# Altium PCB PCB1.PcbDoc
Units mm, origin at the board's own origin, x right, y up, seen from the top; angles counter-clockwise.
Board outline 128.27 x 38.1 mm, 4 copper layers (Top Layer, Inner Layer 1, Inner Layer 2, Bottom Layer), stack 1.586 mm thick; 152 components, 90 nets, 360 pads, 156 vias.
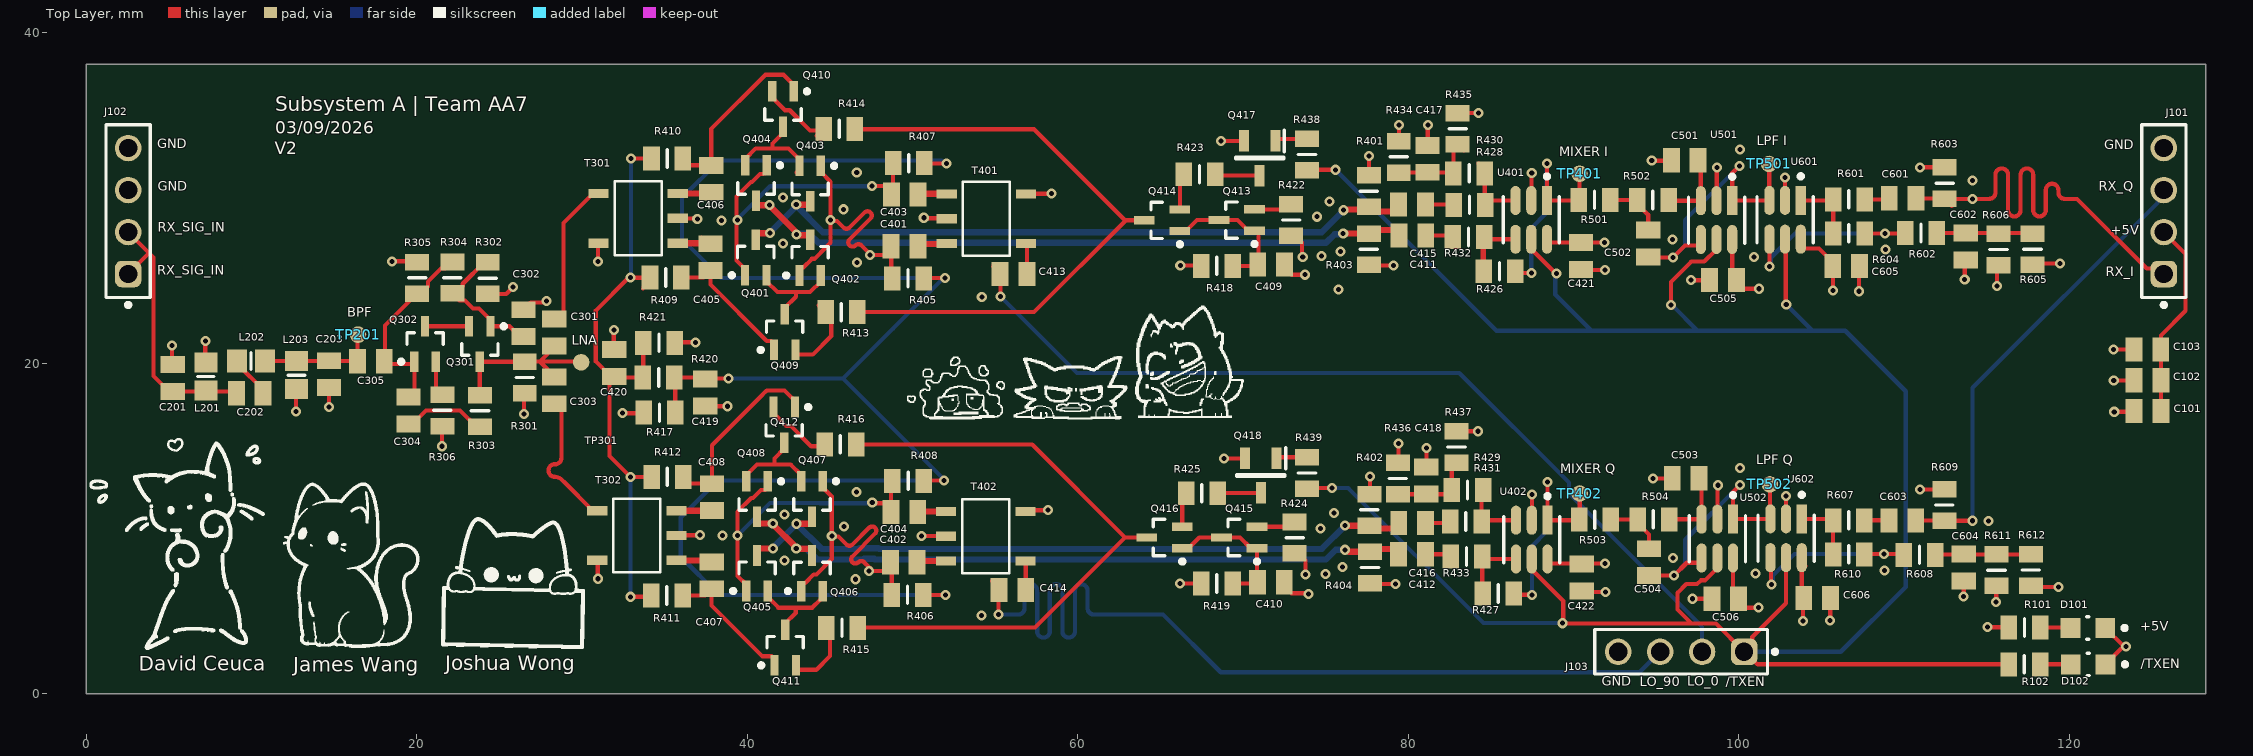
[diagram p0: Top Layer view]
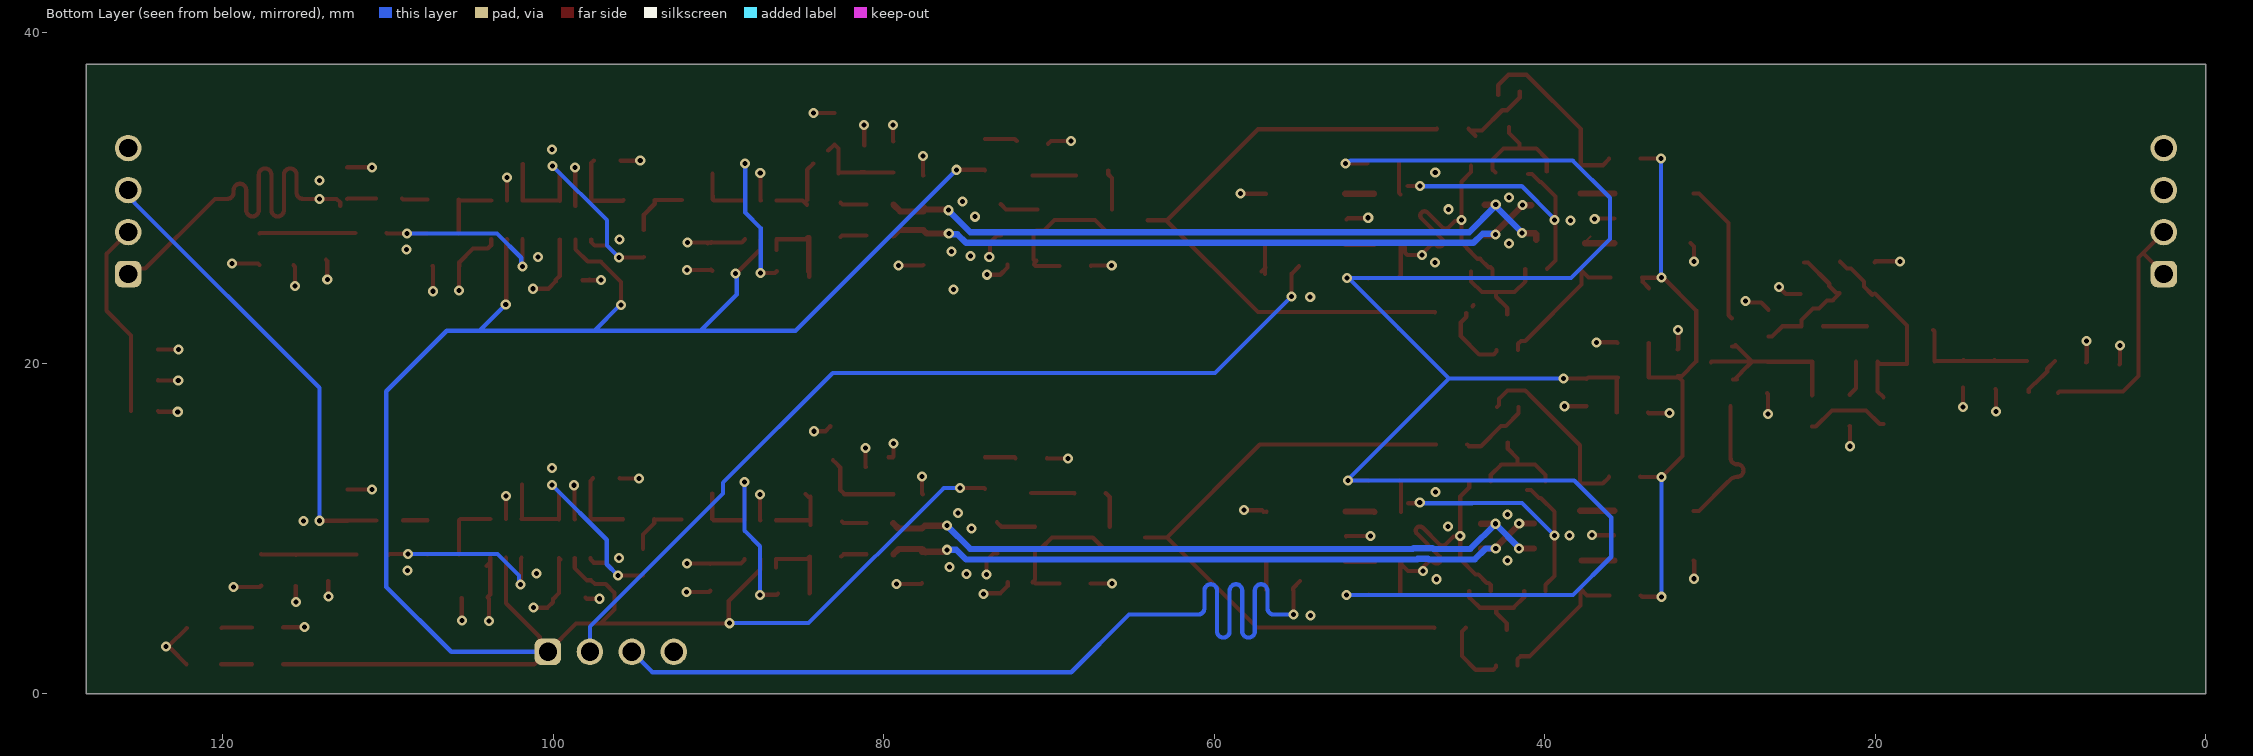
[diagram p1: Bottom Layer view, seen from below]
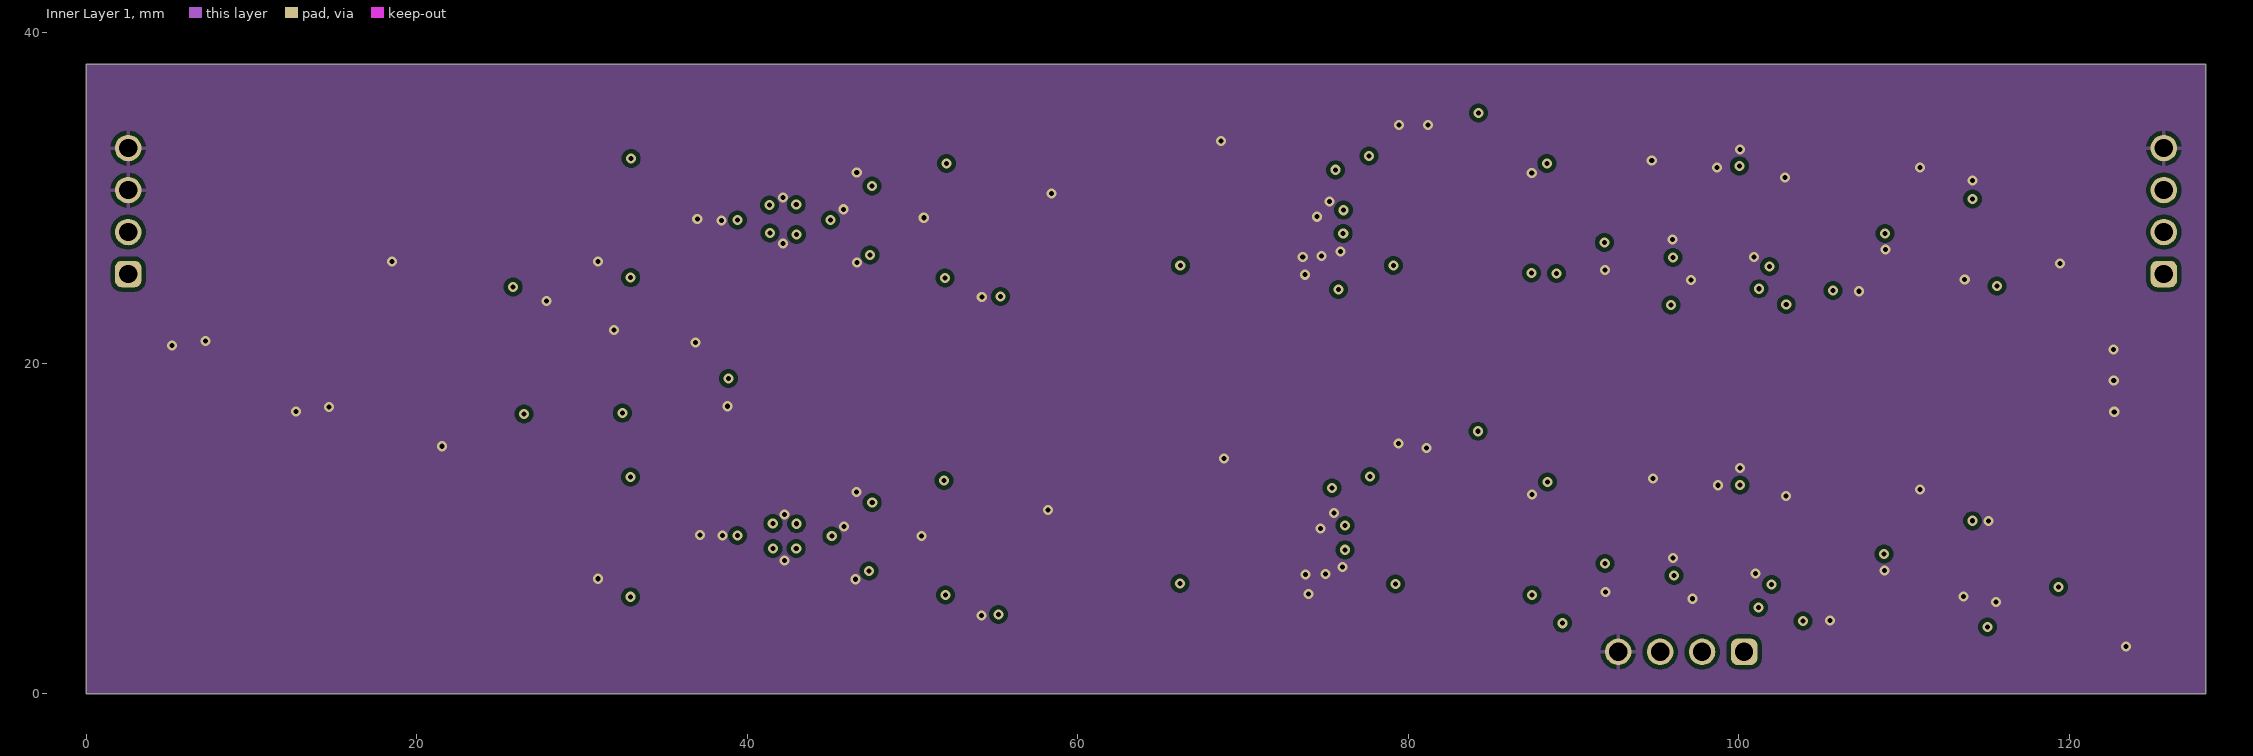
[diagram p2: Inner Layer 1]
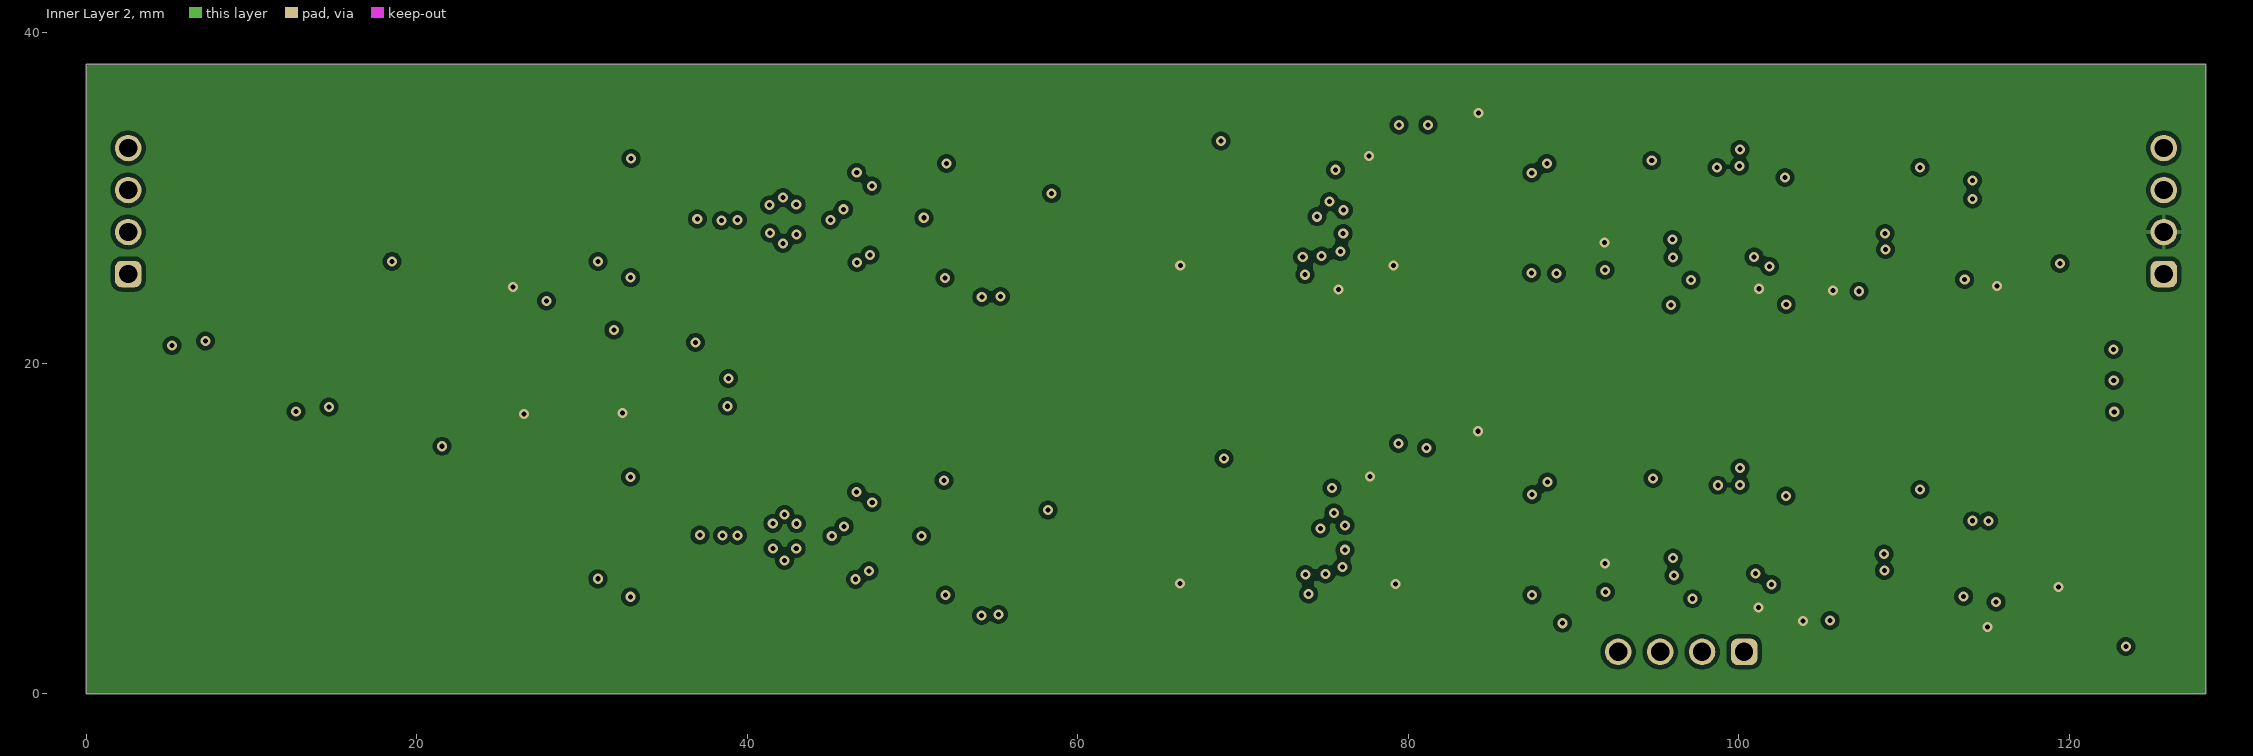
[diagram p3: Inner Layer 2]
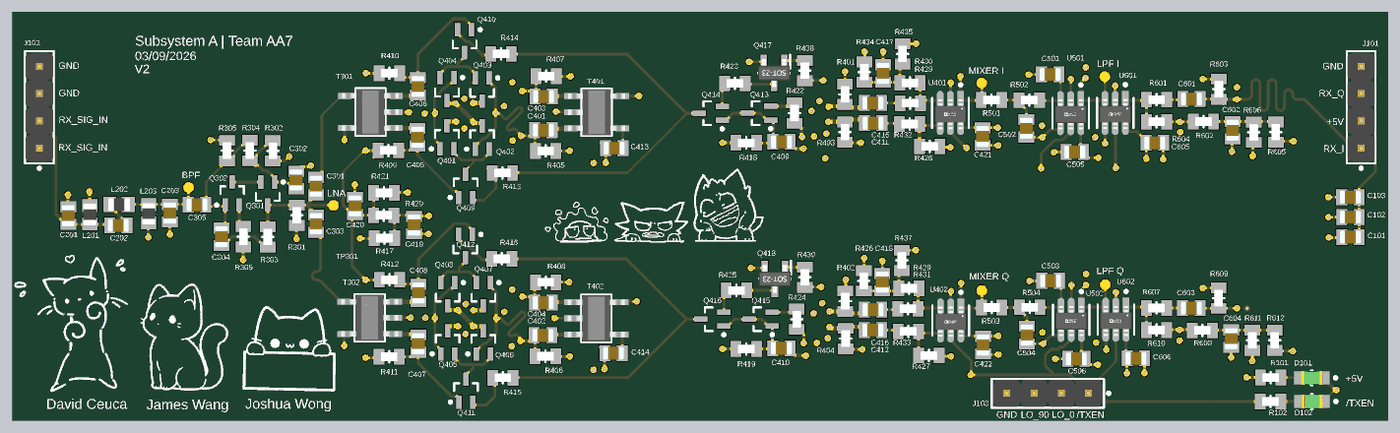
[diagram p4: 3D render of the assembled board from above, using the file's embedded part models]

## Layer stack, top to bottom
Top Solder: solder mask 0.0152, Solder Resist, Dk 3.8
Top Layer: signal copper 0.035
Dielectric 1: prepreg 0.2104, NP-155F, Dk 4.4
Inner Layer 1: signal copper 0.0152
Dielectric 2: core 1.065, NP-155F, Dk 4.43
Inner Layer 2: signal copper 0.0152
Dielectric 3: prepreg 0.2104, NP-155F, Dk 4.4
Bottom Layer: signal copper 0.035
Bottom Solder: solder mask 0.0152, Solder Resist, Dk 3.8

## Board outline
0,0 128.27,0 128.27,38.1 0,38.1

## Design rules (kind name [scope] priority, off if disabled: settings)
Clearance [All] p1: gap=0.254 ignorepadtopadclearanceinfootprint=FALSE except(0: Arc-Hole Track-Hole SMDPad-Hole THPad-Hole Via-Hole Fill-Hole Poly-Hole Region-Hole Text-Hole)
DiffPairsRouting [All] p1: maxlimit=0.254 minlimit=0.254 mostfreqgap=0.254 toplayer_minwidth=0.381 toplayer_maxwidth=0.381 toplayer_prefwidth=0.381 midlayer1_minwidth=0.381 midlayer1_maxwidth=0.381 midlayer1_prefwidth=0.381 midlayer2_minwidth=0.381 midlayer2_maxwidth=0.381 midlayer2_prefwidth=0.381 bottomlayer_minwidth=0.381 bottomlayer_maxwidth=0.381 bottomlayer_prefwidth=0.381 maxuncoupledlength=12.7
HoleSize [All] p1: absolutevalues=TRUE maxlimit=22.86 minlimit=0.305 maxpercent=80.000 minpercent=20.000
MinimumSolderMaskSliver [All] p1: minsoldermaskwidth=0.025
NetAntennae [Not isVia] p1: netantennaetolerance=0
PolygonConnect [All] p1: thpad.connectstyle=Relief thpad.reliefconductorwidth=0.254 thpad.reliefentries=4 thpad.polygonreliefangle="90 Angle" thpad.airgapwidth=0.254 smdpad.connectstyle=Relief smdpad.reliefconductorwidth=0.254 smdpad.reliefentries=4 smdpad.polygonreliefangle="90 Angle" smdpad.airgapwidth=0.254 via.connectstyle=Direct via.reliefconductorwidth=0.254 via.reliefentries=4 via.polygonreliefangle="90 Angle" via.airgapwidth=0.254
RoutingVias [All] p1: holewidth=0.305 width=0.61 viastyle="Through Hole" minholewidth=0.305 minwidth=0.61 maxholewidth=2.54 maxwidth=5.08
SilkToSilkClearance [All] p1: silktosilkclearance=0
SilkToSolderMaskClearance [IsPad] p1: minsilkscreentomaskgap=0.025 clearancetoexposedcopper=TRUE
SolderMaskExpansion [All] p1: expansion=0.102 istentingtop=FALSE
SupplyNets "Schematic Supply Nets_1" [InNet('+5')] p1: voltage=0.000
SupplyNets "Schematic Supply Nets" [InNet('GND')] p2: voltage=0.000
Width [All] p1: maxlimit=5.08 minlimit=0.254 preferedwidth=0.254
24 further rules are at their usual default settings.

## Classes and differential pairs
component class "Quadrature Mixer (Discrete)": C401 C402 C403 C404 C405 C406 C407 C408 C409 C410 C411 C412 C413 C414 C415 C416 C417 C418 C419 C420 C421 C422 Q401 Q402 Q403 Q404 Q405 Q406 Q407 Q408 Q409 Q410 Q411 Q412 Q413 Q414 Q415 Q416 Q417 Q418 R401 R402 R403 R404 R405 R406 R407 R408 R409 R410 R411 R412 R413 R414 R415 R416 R417 R418 R419 R420 R421 R422 R423 R424 R425 R426 R427 R428 R429 R430 R431 R432 R433 R434 R435 R436 R437 R438 R439 T401 T402 TP401 TP402 U401 U402
component class "Low Noise Amplifier (Discrete)": C301 C302 C303 C304 C305 Q301 Q302 R301 R302 R303 R304 R305 R306 T301 T302 TP301
component class "Low-pass Filter": C501 C502 C503 C504 C505 C506 R501 R502 R503 R504 TP501 TP502 U501 U502
component class "Band-pass Filter": C201 C202 C203 L201 L202 L203 TP201
component class Amplifier: C601 C602 C603 C604 C605 C606 R601 R602 R603 R604 R605 R606 R607 R608 R609 R610 R611 R612 U601 U602
component class 01_TOP_LEVEL: C101 C102 C103 D101 D102 J101 J102 J103 R101 R102
differential pair MIXER_Q: +MIXER_Q_P -MIXER_Q_N
differential pair MIXER_I: +MIXER_I_P -MIXER_I_N
differential pair LO_Q: +LO_Q_P -LO_Q_N
differential pair LO_I: +LO_I_P -LO_I_N
differential pair LNA_OUT_Q: +LNA_OUT_Q_P -LNA_OUT_Q_N
differential pair LNA_OUT_I: +LNA_OUT_I_P -LNA_OUT_I_N

## Components (designator, comment, footprint, x,y, rotation, side; value= is the part's Value field where it differs from the comment)
C101 "100nF" CAP_0805 124.74,17.115 r0 top
C102 "1uF" CAP_0805 124.74,18.975 r0 top
C103 "4.7uF" CAP_0805 124.73,20.835 r0 top
C201 "390pF" CAP_0805 5.23,19.111 r90 top
C202 "100pF" CAP_0805 9.9,18.195 r0 top
C203 "390pF" CAP_0805 14.7,19.345 r270 top
C301 "1nF" CAP_0805 28.32,21.86 r90 top
C302 "100nF" CAP_0805 26.47,22.43 r270 top
C303 "1nF" CAP_0805 28.32,18.36 r270 top
C304 "100nF" CAP_0805 19.51,17.14 r270 top
C305 "100nF" CAP_0805 17.23,20.12 r0 top
C401 "100nF" CAP_0805 49.52,27.08 r0 top
C402 "100nF" CAP_0805 49.476,7.961 r0 top
C403 "100nF" CAP_0805 49.537,30.214 r0 top
C404 "100nF" CAP_0805 49.51,11 r0 top
C405 "100nF" CAP_0805 37.78,26.42 r90 top
C406 "100nF" CAP_0805 37.82,31.16 r270 top
C407 "100nF" CAP_0805 37.85,7.17 r90 top
C408 "100nF" CAP_0805 37.87,11.9 r270 top
C409 "100nF" CAP_0805 71.71,25.98 r180 top
C410 "100nF" CAP_0805 71.695,6.745 r180 top
C411 "100nF" CAP_0805 80.23,29.61 r0 top
C412 "100nF" CAP_0805 80.24,10.34 r0 top
C413 "1nF" CAP_0805 56.12,25.4 r0 top
C414 "1nF" CAP_0805 56.05,6.28 r0 top
C415 "100nF" CAP_0805 80.25,27.73 r180 top
C416 "100nF" CAP_0805 80.23,8.44 r180 top
C417 "1uF" CAP_0805 81.175,32.368 r270 top
C418 "1uF" CAP_0805 81.1,12.91 r270 top
C419 "100nF" CAP_0805 37.47,18.23 r90 top
C420 "100nF" CAP_0805 31.96,20.02 r270 top
C421 "100nF" CAP_0805 90.46,26.49 r90 top
C422 "100nF" CAP_0805 90.5,7.04 r90 top
C501 "1nF" CAP_0805 96.74,32.28 r180 top
C502 "2nF" CAP_0805 94.53,27.25 r270 top
C503 "1nF" CAP_0805 96.79,13.04 r180 top
C504 "2nF" CAP_0805 94.58,7.97 r270 top
C505 "100nF" CAP_0805 99.05,25.04 r0 top
C506 "100nF" CAP_0805 99.19,5.75 r0 top
C601 "1uF" CAP_0805 109.92,29.98 r0 top
C602 "1uF" CAP_0805 113.75,27.07 r270 top
C603 "1uF" CAP_0805 109.91,10.48 r0 top
C604 "1uF" CAP_0805 113.63,7.64 r270 top
C605 "100nF" CAP_0805 106.5,25.89 r0 top
C606 "100nF" CAP_0805 104.75,5.8 r0 top
D101 "GREEN" FP-LTST-C170GKT-MFG 121.13,3.981 r180 top
D102 "GREEN" FP-LTST-C170GKT-MFG 121.15,1.781 r180 top
J101 "61300411121" 61300411121 125.73,29.21 r90 top
J102 "61300411121" 61300411121 2.54,29.21 r90 top locked
J103 "61300411121" 61300411121 96.52,2.54 r180 top
L201 "560nH" IND_0805 7.24,19.205 r90 top
L202 "2uH" IND_0805 9.97,20.145 r0 top
L203 "560nH" IND_0805 12.73,19.285 r270 top
Q301 "BFR93AW" INF-SOT323_M 23.82,21.165 r270 top
Q302 "BFR93AW" INF-SOT323_M 20.51,21.17 r90 top
Q401 "BFR93AW" INF-SOT323_M 40.52,26.406 r90 top
Q402 "BFR93AW" INF-SOT323_M 43.81,26.391 r90 top
Q403 "BFR93AW" INF-SOT323_M 43.81,30.875 r270 top
Q404 "BFR93AW" INF-SOT323_M 40.53,30.905 r270 top
Q405 "BFR93AW" INF-SOT323_M 40.6,7.295 r90 top
Q406 "BFR93AW" INF-SOT323_M 43.92,7.29 r90 top
Q407 "BFR93AW" INF-SOT323_M 43.92,11.785 r270 top
Q408 "BFR93AW" INF-SOT323_M 40.6,11.785 r270 top
Q409 "BFR93AW" INF-SOT323_M 42.27,21.885 r90 top
Q410 "BFR93AW" INF-SOT323_M 42.17,35.38 r270 top
Q411 "BFR93AW" INF-SOT323_M 42.3,2.795 r90 top
Q412 "BFR93AW" INF-SOT323_M 42.24,16.275 r270 top
Q413 "BFR93AW" INF-SOT323_M 69.63,28.665 r180 top
Q414 "BFR93AW" INF-SOT323_M 65.11,28.65 r180 top
Q415 "BFR93AW" INF-SOT323_M 69.775,9.455 r180 top
Q416 "BFR93AW" INF-SOT323_M 65.255,9.455 r180 top
Q417 "SI2302A" SOT95P237X112-3N 71.01,32.41 r270 top
Q418 "SI2302A" SOT95P237X112-3N 71.085,13.205 r270 top
R101 "250" RES_0805 117.3,4.011 r180 top
R102 "165" RES_0805 117.29,1.781 r180 top
R301 "500" RES_0805 26.54,19.14 r270 top
R302 "10k" RES_0805 24.3,25.15 r270 top
R303 "200" RES_0805 23.83,17.12 r90 top
R304 "5k" RES_0805 22.16,25.18 r270 top
R305 "5k" RES_0805 20.03,25.17 r270 top
R306 "33" RES_0805 21.55,17.15 r90 top
R401 "2k" RES_0805 77.62,30.42 r90 top
R402 "2k" RES_0805 77.65,11.13 r90 top
R403 "2k" RES_0805 77.62,26.9 r270 top
R404 "2k" RES_0805 77.69,7.64 r270 top
R405 "3.3k" RES_0805 49.73,25.14 r0 top
R406 "3.3k" RES_0805 49.703,5.99 r0 top
R407 "3.3k" RES_0805 49.777,32.114 r0 top
R408 "3.3k" RES_0805 49.74,12.89 r180 top
R409 "3.3k" RES_0805 35.07,25.19 r0 top
R410 "3.3k" RES_0805 35.16,32.39 r0 top
R411 "3.3k" RES_0805 35.14,5.95 r0 top
R412 "3.3k" RES_0805 35.17,13.13 r0 top
R413 "300" RES_0805 45.7,23.09 r180 top
R414 "300" RES_0805 45.57,34.191 r0 top
R415 "300" RES_0805 45.74,3.99 r180 top
R416 "300" RES_0805 45.64,15.09 r0 top
R417 "500" RES_0805 34.7,17.015 r0 top
R418 "2k" RES_0805 68.42,25.896 r180 top
R419 "2k" RES_0805 68.425,6.675 r180 top
R420 "300" RES_0805 34.64,19.14 r180 top
R421 "200" RES_0805 34.66,21.235 r0 top
R422 "100" RES_0805 72.92,28.675 r90 top
R423 "100" RES_0805 67.37,31.44 r180 top
R424 "100" RES_0805 73.135,9.445 r90 top
R425 "100" RES_0805 67.515,12.135 r180 top
R426 "100k" RES_0805 85.53,25.57 r0 top
R427 "100k" RES_0805 85.45,6.07 r0 top
R428 "100k" RES_0805 83.709,29.592 r0 top
R429 "100k" RES_0805 83.49,10.43 r0 top
R430 "100k" RES_0805 83.69,31.49 r0 top
R431 "100k" RES_0805 83.59,12.33 r0 top
R432 "100k" RES_0805 83.652,27.646 r0 top
R433 "100k" RES_0805 83.53,8.31 r0 top
R434 "1k" RES_0805 79.43,32.49 r270 top
R435 "1k" RES_0805 82.992,34.194 r270 top
R436 "1k" RES_0805 79.38,13.03 r270 top
R437 "1k" RES_0805 82.929,14.937 r270 top
R438 "300" RES_0805 73.88,32.63 r90 top
R439 "300" RES_0805 73.88,13.36 r90 top
R501 "1.02k" RES_0805 91.28,29.89 r180 top
R502 "1.43k" RES_0805 94.81,29.88 r180 top
R503 "1.02k" RES_0805 91.3,10.54 r180 top
R504 "1.43k" RES_0805 94.84,10.56 r180 top
R601 "50" RES_0805 106.67,29.92 r0 top
R602 "1k" RES_0805 111.04,27.88 r180 top
R603 "10k" RES_0805 112.47,30.9 r270 top
R604 "30k" RES_0805 106.67,27.86 r180 top
R605 "10k" RES_0805 117.78,26.9 r90 top
R606 "10k" RES_0805 115.72,26.88 r270 top
R607 "50" RES_0805 106.66,10.5 r0 top
R608 "1k" RES_0805 110.94,8.41 r180 top
R609 "10k" RES_0805 112.45,11.42 r270 top
R610 "30k" RES_0805 106.66,8.44 r180 top
R611 "10k" RES_0805 115.6,7.48 r90 top
R612 "10k" RES_0805 117.68,7.49 r270 top
T301 "MABA-011026" MABA-011026_MCM 33.399,28.77 r0 top
T302 "MABA-011026" MABA-011026_MCM 33.328,9.58 r0 top
T401 "MABA-011026" MABA-011026_MCM 54.475,28.75 r180 top
T402 "MABA-011026" MABA-011026_MCM 54.44,9.53 r180 top
TP201 "TPAD10R" TEST_POINT 16.45,21.73 r90 top
TP301 "TPAD10R" TEST_POINT 29.95,20.06 r90 top
TP401 "TPAD10R" TEST_POINT 90.37,31.47 r90 top
TP402 "TPAD10R" TEST_POINT 90.38,12.12 r90 top
TP501 "TPAD10R" TEST_POINT 101.837,32.063 r90 top
TP502 "TPAD10R" TEST_POINT 101.89,12.67 r90 top
U401 "ADA4807-1ARJZ-R7" FP-RJ-6-IPC_A 87.45,28.68 r270 top
U402 "ADA4807-1ARJZ-R7" FP-RJ-6-IPC_A 87.48,9.33 r270 top
U501 "ADA4807-1ARJZ-R7" FP-RJ-6-IPC_A 98.66,28.665 r270 top
U502 "ADA4807-1ARJZ-R7" FP-RJ-6-IPC_A 98.71,9.39 r270 top
U601 "ADA4807-1ARJZ-R7" FP-RJ-6-IPC_A 102.81,28.685 r270 top
U602 "ADA4807-1ARJZ-R7" FP-RJ-6-IPC_A 102.87,9.41 r270 top

## Footprints (in the part's own frame and the unit in brackets; to place one, negate y for a bottom-side part, rotate by r counter-clockwise, add the part's x,y. Pads: shape width x height; smd on the part's side, far side on the other; paste and mask are expansions set on the pad)
61300411121 [mm] "Pin Header, pitch 2.54 mm, THT, Vertical, single row, 4p"
  rrect50% 1.6x1.6 hole 1.1: 1(-3.81,0)
  round 1.6 hole 1.1: 2(-1.27,0) 3(1.27,0) 4(3.81,0)
  silkscreen extent -5.8,-1.35 5.23,1.35, body extent -5.08,-1.27 5.08,1.27, height 8.57
CAP_0805 [mm] "Capacitor SMD 0805"
  rect 1.02x1.47 smd: 1(-0.81,0) 2(0.81,0)
  body extent -1,-0.63 1,0.63, height 0.94
FP-LTST-C170GKT-MFG [mm]
  rect 1.2x1.2 smd paste+0 mask+0: 1(-1.05,0) 2(1.05,0)
  silkscreen extent -2.35,-0.67 0.08,0.67, body extent -1.75,-0.77 1.75,0.77, height 0.25
FP-RJ-6-IPC_A [mm]
  rect 1.756x0.612 smd paste+0 mask+0: 1(-1.175,0.95)
  rrect100% 1.756x0.612 smd paste+0 mask+0: 2(-1.175,0) 3(-1.175,-0.95) 4(1.175,-0.95) 5(1.175,0) 6(1.175,0.95)
  silkscreen extent -2.75,-1.7 1.4,1.7, body extent -2.55,-1.95 2.55,1.95, height 0.25
IND_0805 [mm] "Inductor SMD 0805"
  rect 1.2x1.4 smd: 1(-0.85,0) 2(0.85,0)
  silkscreen extent 0,-0.5 0,0.5, body extent -1,-0.6 1,0.6, height 1.03
INF-SOT323_M [mm] "SOT23, 3-Leads, Body 2x1.25 mm, Pitch 0.65 mm, IPC Low Density"
  rect 1.25x0.5 smd: 1(-1.075,0.65) 2(-1.075,-0.65) 3(1.075,0)
  silkscreen extent -1.2,-1.1 0.67,1.58, body extent -0.67,-1.1 0.67,1.1, height 1
MABA-011026_MCM [mil]
  rect 48x22 smd paste+0 mask+0: 1(-94.5,59.06) 3(-94.5,-59.06) 4(94.5,-59.06) 5(94.5,0) 6(94.5,59.06)
  silkscreen extent -56,-88 56,88, body extent -104,-83 104,83, height 139
RES_0805 [mm] "Resistor SMD 0805"
  rect 1x1.45 smd: 1(-0.95,0) 2(0.95,0)
  silkscreen extent 0,-0.53 0,0.53, body extent -0.77,-0.4 0.77,0.4, height 0.46
SOT95P237X112-3N [mm]
  rect 1.3x0.6 smd: 1(-1.05,0.95) 2(-1.05,-0.95) 3(1.05,0)
  silkscreen extent -1.7,-1.46 0.05,1.5, body extent -1.3,-1.5 1.3,1.5, height 1.1
TEST_POINT [mm]
  round 1 smd paste-1: 1(0,0)

## Part data
C101 C102 C103 C201 C202 C203 C301 C302 C303 C304 C305 C401 C402 C403 C404 C405 C406 C407 C408 C409 C410 C411 C412 C413 C414 C415 C416 C417 C418 C419 C420 C421 C422 C501 C502 C503 C504 C505 C506 C601 C602 C603 C604 C605 C606: library part CAP_0805, "Capacitor SMD 0805", Height=0.94mm
D101 D102: library part CMP-1674-00002-6, "LED GREEN CLEAR SMD", Case Code (Imperial)=0805, Case Code (Metric)=2012, Color=Green, Forward Current=30mA, Forward Voltage=2.1V, Lens Color=Colorless, Max Operating Temperature=85°C, Min Operating Temperature=-55°C, Package Quantity=1, Power Dissipation=100mW, Reverse Voltage=5V, Test Current=10mA, Case/Package=0805, ComponentLink1Description=DigiKey, ComponentLink1URL=https://www.digikey.ca/en/products/detail/liteon/LTST-C170GKT/269226, Depth=1.25mm, Dominant Wavelength=569nm, Height=1.1mm, Illumination Color=Green, Lead Free="Lead Free", Length=2mm, Lens Style=Diffused, Lens Transparency=Clear, Luminous Intensity=6mcd, Mount="Surface Mount", Number of Elements=1, Number of LEDs=1, Number of Pins=2, Packaging="Tape and Reel", Power Rating=100mW, Radiation Hardening=No, Viewing Angle=130°, Voltage=5V, Wavelength=565nm, Width=1.25mm
J101 J102 J103: library part CMP-1502-01064-4, "THT Vertical Pin Header WR-PHD, Pitch 2.54 mm, Single Row, 4 pins", Color=Black, Contact Resistance=20mΩ, Current Rating=3A, Max Operating Temperature=105°C, Min Operating Temperature=-40°C, Operating Supply Voltage=250V, ComponentLink1Description=DigiKey, ComponentLink1URL=https://www.digikey.com/en/products/detail/w%C3%BCrth-elektronik/61300411121/4846827?s=N4IgTCBcDaIGwEYDMAGFAWBWwJAXQF8g, Connector Type="Male Pin", Contact Material=Gold, Contact Mating Length=5.9944mm, Contact Plating=Gold, Gender=Male, Height=8.89mm, Lead Free="Lead Free", Lead Pitch=2.54mm, Mount="Through Hole", Number of Contacts=4, Number of Pins=4, Number of Positions=4, Number of Rows=1, Orientation=Vertical, Packaging=Bulk, Pitch=2.54mm, RoHS=Compliant, Termination=Solder, Voltage Rating=250V
L201 L202 L203: library part IND_0805, "Inductor SMD 0805", Manufacturer_Name="Wurth Elektronik", Manufacturer_Part_Number=74479775147, Mouser Part Number=710-74479775147, Height=1mm, Mouser Price/Stock=https://www.mouser.co.uk/ProductDetail/Wurth-Elektronik/74479775147?qs=2kOmHSv6VfSUJsdJ31GFMQ%3D%3D
Q301 Q302 Q401 Q402 Q403 Q404 Q405 Q406 Q407 Q408 Q409 Q410 Q411 Q412 Q413 Q414 Q415 Q416: library part CMP-1189-00009-1, "NPN Silicon RF Transistor, 12 V VCEO, 90 mA IC, 15.5 dB Gmax, SOT323, Green", Manufacturer=Infineon, ComponentLink1Description="Manufacturer URL", ComponentLink1URL=http://www.infineon.com/, ComponentLink2Description=Datasheet, ComponentLink2URL=http://www.infineon.com/dgdl/Infineon_LNA_BFR93AW.pdf?folderId=db3a30431400ef68011425b1354605c1&fileId=db3a30431441fb5d0114acaaec8c148f&location=en.Products.RF.RF_Transistors_.High_Linearity_Si-_and_SiGe_C-Transistors_for_use_up_to_6_GHz.DATASHEET.Infineon, ComponentLink3Description="Package Specification", ComponentLink3URL=http://www.infineon.com/dgdl/SOT323-Package_Overview.pdf?folderId=db3a30431936bc4b0119533e1dcb3c92&fileId=db3a30431936bc4b011953495f283cb1, ComponentLink4Description=DigiKey, ComponentLink4URL=https://www.digikey.com/en/products/detail/infineon-technologies/BFR93AWH6327XTSA1/2337797, DatasheetVersion=Jul-2012, Gmax (typ)="15.5 dB", Green=yes, Group="For low frequencies, e.g. VHF/UHF", Halogen-free=yes, IC (max)="90 mA", Mounting Technology="Surface Mount", NFmin (typ)="1.5 dB", PackageDescription="3-Pin Small Outline Transistor Package, 1.25 x 2 mm Body, 0.65 mm Pitch", PackageReference=SOT323, PartNumber=BFR93AW, Ptot (max)=300mW, VCEO (max)="12 V"
Q417 Q418: library part SI2302ADS, "MOSFET (N-Channel)", Manufacturer_Name=UMW, ComponentLink2Description=DigiKey, ComponentLink2URL=https://www.digikey.com/en/products/detail/umw/SI2302A/16705922, Datasheet Link=https://mm.digikey.com/Volume0/opasdata/d220001/medias/docus/2593/UMW%20SI2302A.pdf, Height=1.12mm, Manufacturer_Part_Number=SI2302A
R101 R102 R301 R302 R303 R304 R305 R306 R401 R402 R403 R404 R405 R406 R407 R408 R409 R410 R411 R412 R413 R414 R415 R416 R417 R418 R419 R420 R421 R422 R423 R424 R425 R426 R427 R428 R429 R430 R431 R432 R433 R434 R435 R436 R437 R438 R439 R501 R502 R503 R504 R601 R602 R603 R604 R605 R606 R607 R608 R609 R610 R611 R612: library part RES_0805, "Resistor SMD 0805"
T301 T302 T401 T402: "RF Transformer", Frequency Range="2MHz ~ 200MHz", Manufacturer_Name=MACOM, Package=SMD, ComponentLink1Description=DigiKey, ComponentLink1URL=https://www.digikey.com/en/products/detail/macom-technology-solutions/MABA-011026/12757346, Copyright="Copyright (C) 2025 Ultra Librarian. All rights reserved.", Data Sheet=https://cdn.macom.com/datasheets/MABA-011026.pdf, Impedance=1:1, Insertion Loss=1.0dB, Manufacturer_Part_Number=MABA-011026, Phase Difference=0.5°, Return Loss=12.0dB
TP201 TP301 TP401 TP402 TP501 TP502: library part TEST_POINT, "Testpont Pad 10R"
U401 U402 U501 U502 U601 U602: library part CMP-09116-000179-1, "IC OPAMP VFB 1 CIRCUIT SOT23-6", Case/Package=SOT-23-6, Dual Supply Voltage=5V, Input Bias Current=1.2uA, Input Offset Voltage (Vos)=20uV, Max Frequency=100kHz, Max Input Voltage=11V, Max Operating Temperature=125°C, Min Input Voltage=2.7V, Min Operating Temperature=-40°C, Min Supply Voltage=3V, Operating Supply Current=950uA, Operating Supply Voltage=10V, Output Current=60mA, Output Current per Channel=106mA, Power Supply Rejection Ratio (PSRR)=105dB, Voltage Gain=130dB, -3db Bandwidth=180MHz, Bandwidth=200MHz, Common Mode Rejection Ratio=96dB, ComponentLink1Description=DigiKey, ComponentLink1URL=https://www.digikey.com/en/products/detail/analog-devices-inc/ADA4807-1ARJZ-R2/5057389, Contact Plating=Tin, Gain Bandwidth Product=200MHz, Height=1.3mm, Lead Free="Contains Lead", Length=3mm, Max Supply Voltage=11V, Mount="Surface Mount", Number of Amplifiers=1, Number of Circuits=1, Number of Pins=6, Packaging="Cut Tape", REACH SVHC="No SVHC", RoHS Compliant=Yes, Slew Rate=225V/µs, Width=1.7mm

## Via types
v1: diameter 0.61, hole 0.305, Top Layer to Bottom Layer, 156 vias

## Nets (pads, with @x,y where several pads share a name; then routed paths per layer and width w, separated by ;. In a path a pad name is that pad's centre, name@x,y a point inside that pad or via, vN(x,y) a via of type N, cw(c..) or ccw(c..) an arc to the next point about the centre after c; other vN are vias at no path point)
+5: C101.2 C102.2 C103.2 C421.2 C422.2 C505.2 C506.2 C605.1 C606.1 J101.2 R101.2 R301.2 R302.2 R401.2 R402.2 R403.2 R404.2 R417.1 R418.2 R419.2 R435.1 R437.1 R606.2 R612.2 U401.6 U402.6 U501.6 U502.6 U601.6 U602.6 | length 55.2
  Top Layer w0.254: R302.2@24.525,24.2 25.42,24.2 v1(25.84,24.62) ; v1(26.5,16.93) 26.5,18.15 R301.2 ; v1(32.444,16.98) 33.715,16.98 R417.1 ; v1(66.2,6.68) 67.47,6.68 R419.2 ; v1(66.21,25.91) 67.456,25.91 R418.2 ; R403.2 77.66,25.91 v1(79.1,25.91) ; R401.2 77.624,31.374 v1(77.624,32.542) ; R402.2 77.696,12.126 v1(77.696,13.144) ; R404.2 77.74,6.64 v1(79.24,6.64) ; R435.1 82.996,35.14 v1(84.26,35.14) ; R437.1@83.249,16.207 83.249,16.165 83.527,15.887 v1(84.229,15.887) ; U401.6 88.475,27.43 88.595,27.31 C421.2@90.45,27.31 ; U402.6 88.43,8.1 88.64,7.89 C422.2@90.46,7.89 ; C421.2@90.43,27.33 C421.2@90.45,27.31 ; C421.2@90.66,27.25 C421.2@90.7,27.29 ; v1(91.87,27.31) C421.2@90.47,27.31 ; v1(91.91,7.89) C422.2@90.54,7.89 ; U502.6@99.573,8.128 U502.6 99.66,6.09 C506.2 100.02,5.73 100.02,5.542 100.352,5.21 v1(101.19,5.21) ; U501.6 99.61,25.29 C505.2 99.86,24.942 100.292,24.51 v1(101.23,24.51) ; U601.6 103.76,27.148 103.97,26.938 104.867,26.938 105.69,26.115 C605.1 105.71,25.87 v1(105.71,24.41) ; U602.6 U602.6@103.82,7.952 ; v1(103.89,4.41) 103.89,5.75 C606.1 ; C606.1@103.98,5.84 103.82,6 U602.6@103.82,7.952 ; U602.6@104.03,7.741 U602.6@103.82,7.952 ; v1(115.06,4.031) 116.33,4.031 R101.2 ; v1(115.63,24.67) 115.63,25.84 R606.2 ; R612.2 117.75,6.47 v1(119.36,6.47) ; C101.2 C102.2 125.55,21.676 127.05,23.176 127.05,26.625 J101.2@125.69,27.985 ; C421.2@90.45,27.31 C421.2@90.47,27.31 ; C421.2@90.45,27.31 C421.2 C421.2@90.47,27.31 ; C422.2@90.46,7.89 C422.2@90.54,7.89 ; C422.2@90.46,7.89 C422.2 C422.2@90.54,7.89
  other v1: 75.78,24.46
/TXEN: J103.1 R102.2 R438.1 R439.1 U401.5 U402.5 U501.5 U502.5 U601.5 U602.5 | length 150.4
  Top Layer w0.254: R439.1 73.93,12.46 v1(75.4,12.46) ; R438.1 73.91,31.71 v1(75.61,31.71) ; U401.5 87.45,26.911 88.931,25.43 v1(88.97,25.43) ; U402.5 87.48,7.51 89.384,5.606 89.384,4.314 v1(89.34,4.27) ; v1@89.362,4.292 89.41,4.244 97.156,4.244 ; v1(95.9,23.52) 95.9,24.92 97.136,26.156 97.919,26.156 98.66,26.897 U501.5 ; U502.5 98.71,7.621 97.955,6.866 97.712,6.866 97.486,6.64 96.83,6.64 96.3,6.11 96.3,5.1 97.156,4.244 ; U601.5@102.78,27.479 U601.5 102.845,27.474 102.845,23.585 v1(102.88,23.55) ; U602.5 102.87,5.48 100.822,3.432 100.822,3.032 J103.1 ; R102.2 101.152,1.781 100.393,2.54 J103.1 ; 97.156,4.244 98.626,4.244 J103.1
  Bottom Layer w0.254: v1(75.4,12.46) 76.37,12.46 84.55,4.28 89.33,4.28 v1(89.34,4.27) ; v1(75.61,31.71) 85.35,21.97 91.1,21.97 ; v1(88.97,25.43) 88.902,25.362 88.902,24.168 91.1,21.97 ; v1(95.9,23.52) 95.96,23.52 97.51,21.97 ; J103.1 106.18,2.54 110.11,6.47 110.11,18.31 106.45,21.97 104.46,21.97 ; v1(102.88,23.55) 104.46,21.97 ; 91.1,21.97 97.51,21.97 ; 97.51,21.97 104.46,21.97
BANDPASS_OUT: C203.1 C305.1 L202.2 L203.1 TP201.1 | length 7.7
  Top Layer w0.254: L202.2 L203.1@12.72,20.145 ; L203.1@12.79,20.195 L203.1 L203.1@12.72,20.145 ; C203.1@14.66,20.195 C203.1 ; TP201.1@16.5,22.02 16.42,21.94 C305.1 16.395,20.145 14.66,20.145 12.79,20.145 L203.1@12.72,20.145
GND: C101.1 C102.1 C103.1 C201.2 C203.2 C302.1 C409.1 C410.1 C417.1 C418.1 C419.1 C420.1 C421.1 C422.1 C501.2 C503.2 C505.1 C506.1 C602.2 C604.2 C605.2 C606.2 D101.1 D102.1 J101.4 J102.3 J102.4 J103.4 L201.2 L203.2 Q417.2 Q418.2 R305.1 R306.1 R421.2 R422.1 R424.1 R434.1 R436.1 R603.1 R605.1 R609.1 R611.1 T301.3 T301.5 T302.3 T302.5 T401.3 T401.5 T402.3 T402.5 U401.2 U402.2 U501.2 U502.2 U601.2 U602.2 | length 73.3
  Top Layer w0.254: v1(5.2,21.065) 5.2,19.951 C201.2 ; v1(7.21,21.345) 7.21,20.085 L201.2 ; v1(12.69,17.08) 12.69,18.395 L203.2 ; v1(14.7,17.36) C203.2 ; v1(18.51,26.17) 19.98,26.17 R305.1 ; v1(21.53,14.98) 21.53,16.18 R306.1 ; C302.1 26.902,23.672 27.621,23.672 27.728,23.779 v1(27.851,23.779) ; v1(30.96,6.96) 30.96,8.031 T302.3@30.999,8.07 ; v1(30.98,26.16) 30.98,27.069 31.181,27.27 T301.3@31.186,27.27 ; v1(31.93,22.01) 31.93,20.86 C420.1 ; R421.2 35.645,21.27 v1(36.87,21.27) ; T301.5 35.814,28.755 36.965,28.755 v1(36.98,28.74) ; T302.5@35.805,9.575 35.817,9.588 37.126,9.588 v1(37.134,9.596) ; C419.1 37.49,17.4 v1(38.81,17.4) ; v1(50.55,9.557) 50.563,9.544 52.026,9.544 T402.5 ; v1(50.687,28.806) 50.715,28.778 51.92,28.778 T401.5@52.005,28.693 ; T402.3 T402.3@56.85,11.02 ; T401.3 56.889,30.264 v1(58.427,30.264) ; T402.3@57.02,11.02 57.11,11.11 v1(58.21,11.11) ; v1(68.68,33.45) 69.89,33.45 Q417.2@70.06,33.28 ; v1(68.855,14.235) 70.115,14.235 Q418.2 ; C410.1 72.505,6.52 72.937,6.088 73.932,6.088 v1(73.98,6.04) ; C409.1 72.52,25.792 72.952,25.36 v1(73.76,25.36) ; R422.1 73.145,27.725 73.567,27.303 73.567,26.493 v1(73.62,26.44) ; R424.1 73.36,8.495 73.782,8.073 v1(73.782,7.228) ; v1(79.411,15.152) 79.411,14.353 79.454,14.31 R436.1@79.71,14.31 ; R434.1 79.45,33.46 v1(79.45,34.41) ; C418.1 81.11,13.73 v1(81.11,14.88) ; C417.1 81.19,33.193 v1(81.19,34.41) ; U401.2 87.465,29.87 87.465,31.495 v1(87.48,31.51) ; U402.2 87.493,10.518 87.493,12.038 v1(87.506,12.05) ; C421.1@90.38,25.6 C421.1 90.49,25.65 v1(91.9,25.65) ; C422.1 90.57,6.16 v1(91.93,6.16) ; v1(94.74,32.26) 95.91,32.26 C501.2 ; v1(94.82,13.02) 95.96,13.02 C503.2 ; v1(97.11,25.03) 98.23,25.03 C505.1 ; v1(97.21,5.75) 97.975,5.75 C506.1@98.055,5.83 ; C505.1@97.808,25.05 C505.1@97.82,25.062 ; U501.2@98.665,29.52 98.675,29.53 98.675,31.825 v1(98.69,31.84) ; U502.2 98.725,10.58 98.725,12.605 v1(98.74,12.62) ; U601.2 v1(102.81,31.238) ; U602.2 v1(102.87,11.963) ; v1(105.54,4.43) 105.54,5.78 C606.2 ; v1(107.29,24.36) 107.29,25.87 C605.2 ; v1(110.97,31.86) 112.46,31.86 R603.1 ; v1(110.98,12.36) 112.44,12.36 R609.1 ; v1(113.618,5.882) 113.618,6.818 C604.2 ; v1(113.68,25.08) 113.68,26.19 C602.2 ; v1(115.584,5.545) 115.584,6.514 R611.1 ; R605.1 117.87,26.04 v1(119.44,26.04) ; D101.1 v1@123.31,2.851 ; D102.1 123.183,2.765 123.223,2.765 v1@123.31,2.851 ; v1(122.68,20.835) C103.1 ; v1(122.7,18.955) 123.91,18.955 C102.1 ; v1(122.73,17.065) 123.88,17.065 C101.1 ; v1(123.43,2.851) v1@123.31,2.851
  other v1: 54.186,4.738 46.56,6.93 75,7.24 101.03,7.27 108.813,7.453 76.02,7.68 42.263,8.073 96.03,8.22 38.507,9.59 74.7,10 45.87,10.13 115.113,10.453 42.27,10.859 75.5,10.94 46.61,12.214 100.09,13.66 54.197,24.018 46.65,26.11 100.94,26.42 74.75,26.5 75.896,26.753 108.88,26.89 42.16,27.24 96,27.49 38.45,28.63 74.49,28.87 45.84,29.32 75.24,29.79 42.16,30.03 114.16,31.07 46.63,31.54 100.07,32.93
LNA_OUT_I_N: C406.2 T301.6 | length 2
  Top Layer w0.381: T301.6 C406.2@37.82,30.27
LNA_OUT_I_P: C405.2 T301.4 | length 2.4
  Top Layer w0.102: C405.2@37.23,27.689 C405.2@37.689,27.23
  Top Layer w0.381: T301.4 C405.2@37.564,27.27
LNA_OUT_Q_N: C408.2 T302.6 | length 2.1
  Top Layer w0.381: T302.6@35.799,11.07 C408.2@37.85,11.07
LNA_OUT_Q_P: C407.2 T302.4 | length 2
  Top Layer w0.381: T302.4@35.799,8.07 C407.2@37.76,8.07
LO_F1_0_IN: C413.1 J103.2 | length 54.7
  Top Layer w0.254: C413.1@54.878,25.869 55.31,25.437 C413.1 55.33,25.38 v1(55.33,24.04)
  Bottom Layer w0.254: v1(55.33,24.04) 59.96,19.41 83.09,19.41 89.724,12.776 89.724,12.126 97.79,4.06 J103.2
LO_F1_90_IN: C414.1 J103.3 | length 58.8
  Top Layer w0.254: C414.1@54.808,6.82 55.24,6.388 C414.1 55.21,6.25 v1(55.21,4.8)
  Bottom Layer w0.254: v1(55.21,4.8) 56.28,4.8 56.407,4.8 ccw(c56.407,5.181) 56.788,5.181 56.788,6.244 cw(c57.169,6.244) 57.55,6.244 57.55,3.778 ccw(c57.931,3.778) 58.312,3.778 58.312,6.244 cw(c58.693,6.244) 59.074,6.244 59.074,3.778 ccw(c59.455,3.778) 59.836,3.778 59.836,6.244 cw(c60.217,6.244) 60.598,6.244 60.598,5.181 ccw(c60.979,5.181) 60.979,4.8 64.54,4.8 65.16,4.8 68.66,1.3 94.01,1.3 J103.3
LO_I_N: C401.2 T401.6 | length 1.7
  Top Layer w0.381: C401.2@50.339,27.214 T401.6@52.038,27.214
LO_I_P: C403.2 T401.4 | length 1.7
  Top Layer w0.381: C403.2@50.339,30.254 T401.4@52.07,30.254
LO_Q_N: C402.2 T402.6 | length 1.8
  Top Layer w0.381: C402.2@50.29,8.05 50.31,8.03 T402.6
LO_Q_P: C404.2 T402.4 | length 1.7
  Top Layer w0.381: C404.2 50.35,11.03 T402.4
LOWPASS_OUT_I: C502.2 TP501.1 U501.1 U501.4 U601.3 | length 17.7
  Top Layer w0.254: C502.2 94.57,26.4 v1(96.02,26.4) 96.749,27.129 97.499,27.129 97.71,27.34 U501.4 ; v1(100.04,31.95) 99.61,31.52 U501.1 99.629,29.86 U601.3 101.848,29.872 101.848,32.051 TP501.1
  Bottom Layer w0.254: v1(96.02,26.4) 96.75,27.13 96.75,28.66 v1(100.04,31.95)
LOWPASS_OUT_Q: C504.2 TP502.1 U502.1 U502.4 U602.3 | length 17.4
  Top Layer w0.254: C504.2 94.581,7.161 v1(96.091,7.161) 96.861,7.932 97.549,7.932 97.76,8.142 U502.4 ; v1(100.09,12.64) 99.66,12.21 U502.1 99.68,10.585 U602.3 101.905,10.6 101.905,12.655 TP502.1
  Bottom Layer w0.254: v1(96.091,7.161) 96.77,7.841 96.77,9.32 v1(100.09,12.64)
MIXER_I_N: C415.2 Q402.3 Q404.3 R403.1 | length 40.8
  Top Layer w0.381: 40.821,29.572 v1(41.341,29.572) 42.946,27.967 42.946,27.844 43.034,27.756 43.621,27.756 Q402.3@43.638,27.74 ; v1(76.07,27.86) 77.42,27.86 77.62,28.06 79.11,28.06 C415.2
  Bottom Layer w0.381: v1(42.99,27.8) 43.034,27.844 43.196,27.844 43.199,27.847 43.763,27.847 44.316,27.295 47.123,27.295 47.129,27.3 47.75,27.3 47.755,27.295 75.026,27.295 75.548,27.816 76.026,27.816 v1(76.07,27.86)
MIXER_I_P: C411.1 Q401.3 Q403.3 R401.1 | length 42.3
  Top Layer w0.381: Q401.3 40.52,27.816 40.579,27.876 v1(41.386,27.876) ; v1(42.97,29.601) Q403.3@43.638,29.601 ; v1(76.096,29.263) 76.14,29.306 77.456,29.306 R401.1@77.48,29.33 ; R401.1 R401.1@77.48,29.33 ; C411.1 79,29.19 77.62,29.19 R401.1@77.48,29.33
  Bottom Layer w0.381: v1(41.386,27.876) 41.386,27.921 v1@42.918,29.453 ; v1(42.97,29.601) 42.97,29.539 42.987,29.522 44.579,27.93 46.86,27.93 46.866,27.935 48.013,27.935 48.018,27.93 74.763,27.93 v1(76.096,29.263)
MIXER_OUT_I: R426.2 R501.2 TP401.1 U401.1 | length 14.1
  Top Layer w0.254: R426.2 86.584,25.466 v1(87.454,25.466) ; v1(88.39,32.1) 88.395,32.095 88.395,29.86 U401.1 90.295,29.855 R501.2 ; R501.2@90.33,30.115 R501.2 ; TP401.1 90.37,29.93 R501.2
  Bottom Layer w0.254: v1(87.454,25.466) 87.454,28.184 88.39,29.12 v1(88.39,32.1)
MIXER_OUT_Q: R427.2 R503.2 TP402.1 U402.1 | length 14.2
  Top Layer w0.254: R427.2 86.48,5.99 v1(87.5,5.99) ; v1(88.44,12.81) 88.435,12.805 88.435,10.51 U402.1 90.315,10.505 R503.2 90.38,10.57 TP402.1
  Bottom Layer w0.254: v1(87.5,5.99) 87.5,8.93 88.44,9.87 v1(88.44,12.81)
MIXER_Q_N: C416.2 Q406.3 Q408.3 R404.1 | length 41.3
  Top Layer w0.381: Q408.3@40.66,10.31 v1(41.55,10.31) 41.55,10.26 v1@42.99,8.82 ; v1@42.99,8.77 Q406.3@43.861,8.77 ; v1(76.174,8.714) 76.297,8.714 76.421,8.59 R404.1 ; R404.1@77.48,8.55 77.69,8.76 79.1,8.76 C416.2
  Bottom Layer w0.381: v1(42.969,8.791) 43.581,8.791 44.242,8.13 47.022,8.13 47.064,8.172 47.685,8.172 47.727,8.13 75.032,8.13 75.615,8.714 v1(76.174,8.714)
MIXER_Q_P: C412.1 Q405.3 Q407.3 R402.1 | length 41.8
  Top Layer w0.381: Q405.3@40.659,8.793 v1(41.562,8.793) ; v1(42.98,10.29) Q407.3@43.861,10.29 ; v1(76.186,10.172) R402.1@77.478,10.172 ; R402.1@77.528,10.172 77.7,10 79.11,10 C412.1@79.43,10.32
  Bottom Layer w0.381: v1(41.562,8.793) 41.562,8.832 42.98,10.251 v1(42.98,10.29) 44.505,8.765 46.759,8.765 46.801,8.807 47.948,8.807 47.991,8.765 74.769,8.765 76.176,10.172 v1@76.236,10.172
NetC202_2: C202.2 L202.1 | length 2.6
  Top Layer w0.254: L202.1 9.593,19.672 9.593,19.508 10.298,18.803 10.327,18.803 10.72,18.41 C202.2@10.72,18.265
NetC301_1: C301.1 C303.1 Q301.3 R301.1 R303.2 TP301.1 | length 11.6
  Top Layer w0.254: R303.2 23.82,18.08 Q301.3 R301.1 ; R301.1@26.551,20.101 27.466,20.101 ; C303.1@28.383,19.026 C303.1@28.608,19.026 ; C301.1@28.435,21.01 C301.1@28.66,21.01 ; C301.1@28.465,21.1 27.466,20.101 ; C303.1@28.533,19.016 28.101,19.448 28.101,19.466 27.54,20.027 27.466,20.101 ; TP301.1 29.909,20.101 27.466,20.101
NetC301_2: C301.2 T301.1 | length 8.7
  Top Layer w0.254: C301.2@28.69,22.72 28.88,22.91 28.88,28.482 30.668,30.27 T301.1
NetC302_2: C302.2 Q301.1 R302.1 R304.2 | length 8.6
  Top Layer w0.254: R304.2 22.582,23.808 22.928,23.808 23.417,23.319 23.766,23.319 24.47,22.615 Q301.1 25.625,22.24 26.245,21.62 C302.2 ; R304.2@22.16,24.25 22.365,24.25 22.787,24.672 22.787,24.812 24.075,26.1 R302.1
NetC303_2: C303.2 T302.1 | length 8.4
  Top Layer w0.254: C303.2@28.758,17.396 28.758,15.018 28.758,14.271 cw(c28.377,14.271) 28.377,13.89 28.357,13.89 ccw(c28.357,13.509) 28.357,13.128 cw(c28.341,12.478) 28.801,12.938 28.928,12.811 30.669,11.07 T302.1@30.999,11.07
NetC304_1: C304.1 C305.2 Q302.1 R304.1 R305.2 | length 12.1
  Top Layer w0.254: C304.1 19.86,18.3 Q302.1 19.725,19.96 18.09,19.96 18.09,22.28 R305.2 ; R305.2@20.185,24.15 20.677,24.642 20.677,24.73 20.68,24.733 20.68,24.94 21.468,25.728 21.718,25.728 R304.1@22.14,26.15
NetC304_2: C304.2 R303.1 | length 5.1
  Top Layer w0.254: C304.2 19.735,16.33 20.555,17.15 22.625,17.15 23.605,16.17 R303.1
NetC401_1: C401.1 Q402.1 Q403.1 R405.1 | length 18.6
  Top Layer w0.254: Q402.1 43.16,25.691 43.283,25.814 43.405,25.814 43.913,26.322 44.08,26.322 44.441,26.683 44.441,26.691 45.05,27.3 45.05,28.543 45.05,30.985 44.46,31.575 Q403.1 ; v1@45.05,28.63 45.069,28.611 45.439,28.611 45.747,28.303 45.837,28.213 ccw(c46.017,28.393) 46.196,28.213 47.106,29.123 cw(c47.286,28.943) 47.465,29.123 cw(c47.286,28.943) 47.465,28.764 46.196,27.495 ccw(c46.376,27.315) 46.196,27.135 ccw(c46.376,27.315) 46.555,27.135 ; 46.555,27.135 cw(c46.735,26.956) 46.915,27.135 47.255,26.795 v1@47.482,26.568 ; v1(47.439,26.55) 48.327,26.55 48.463,26.686 C401.1@48.463,27.016 ; C401.1@48.66,27.03 C401.1 ; C401.1@48.67,27.1 C401.1@48.71,27.14 ; C401.1@48.719,27.214 48.719,25.332 R405.1@48.797,25.254
  other v1: 45.05,28.679
NetC402_1: C402.1 Q406.1 Q407.1 R406.1 | length 19
  Top Layer w0.254: Q406.1 43.27,6.59 43.393,6.713 43.515,6.713 44.023,7.221 44.191,7.221 45.12,8.15 v1(45.12,9.55) ; Q407.1 44.57,12.485 45.12,11.935 v1(45.12,9.55) ; v1@47.379,7.462 47.487,7.57 v1@47.487,7.518 ; v1@47.47,7.506 47.47,7.57 47.085,7.955 ccw(c46.905,7.776) 46.726,7.955 cw(c46.546,8.135) 46.366,7.955 cw(c46.546,8.135) 46.366,8.314 47.743,9.691 ccw(c47.563,9.871) 47.743,10.05 ccw(c47.563,9.871) 47.384,10.05 46.366,9.033 cw(c46.187,9.212) 46.007,9.033 45.917,9.123 45.53,9.51 45.16,9.51 v1(45.12,9.55) ; v1@47.483,7.479 47.539,7.423 48.283,7.423 48.666,7.806 C402.1 ; C402.1@48.67,8 48.75,7.92 48.75,7.806 R406.1@48.75,6.07
  other v1: 47.375,7.423
NetC403_1: C403.1 Q401.1 Q404.1 R407.1 | length 18.6
  Top Layer w0.254: Q401.1@39.86,25.716 39.35,26.226 39.35,28.61 v1(39.42,28.68) 39.35,28.75 39.35,30.086 40.238,30.974 40.288,30.974 40.769,31.455 Q404.1@41.008,31.455 ; v1(47.55,30.73) C403.1@48.295,30.73 ; C403.1 48.827,30.314 R407.1
  Bottom Layer w0.254: v1(39.42,28.68) 39.42,28.74 41.397,30.717 47.537,30.717 v1(47.55,30.73)
NetC404_1: C404.1 Q405.1 Q408.1 R408.2 | length 18.9
  Top Layer w0.254: Q405.1 39.95,6.595 39.41,7.135 v1(39.41,9.58) 39.41,11.02 40.244,11.854 40.358,11.854 40.839,12.335 Q408.1@41.078,12.335 ; v1(47.568,11.564) 47.602,11.53 C404.1@48.268,11.53 ; C404.1 48.7,12.8 R408.2
  Bottom Layer w0.254: v1(39.41,9.58) 41.375,11.545 44.381,11.545 44.397,11.528 47.533,11.528 v1(47.568,11.564)
NetC405_1: C405.1 Q409.1 R409.2 | length 8.5
  Top Layer w0.254: R409.2 37.36,25.19 C405.1 37.78,24.76 41.183,21.357 41.448,21.357 41.62,21.185 Q409.1
NetC406_1: C406.1 Q410.1 R410.2 | length 11.3
  Top Layer w0.254: R410.2 36.11,32.36 36.483,31.987 C406.1@37.803,31.987 ; C406.1 37.82,34.17 41.111,37.461 42.189,37.461 42.82,36.83 Q410.1@42.82,36.24
NetC407_1: C407.1 Q411.1 R411.2 | length 8.5
  Top Layer w0.254: R411.2 37.44,5.95 C407.1 37.85,5.34 40.923,2.267 41.478,2.267 41.65,2.095 Q411.1
NetC408_1: C408.1 Q412.1 R412.2 | length 11.3
  Top Layer w0.254: R412.2 36.12,13.098 36.493,12.725 C408.1@37.855,12.725 ; C408.1 37.87,15.04 40.959,18.129 40.959,18.133 41.182,18.356 42.261,18.356 42.767,17.85 42.767,17.473 Q412.1
NetC409_2: C409.2 Q413.1 Q413.3 Q414.1 R418.1 | length 8.7
  Top Layer w0.254: Q414.1 66.56,28 67.225,28.665 Q413.3 69.68,28.665 70.33,28.015 Q413.1 70.768,28.015 70.94,27.843 C409.2@70.94,26.275 ; R418.1 70.816,25.896 C409.2 ; C409.2@70.76,26.21 C409.2@70.87,26.1
NetC410_2: C410.2 Q415.1 Q415.3 Q416.1 R419.1 | length 8.7
  Top Layer w0.254: Q416.1 66.705,8.805 67.355,9.455 Q415.3 69.825,9.455 70.475,8.805 Q415.1 70.85,6.9 C410.2@71.005,6.745 ; R419.1 70.815,6.675 C410.2
NetC411_2: C411.2 R428.1 | length 1.6
  Top Layer w0.254: C411.2 82.51,29.61 R428.1@82.62,29.72
NetC412_2: C412.2 R429.1 | length 1.5
  Top Layer w0.254: C412.2 82.45,10.34 R429.1
NetC413_2: C413.2 T401.1 | length 2.2
  Top Layer w0.254: T401.1 56.93,27.195 C413.2 ; C413.2@56.906,25.795 C413.2@57.146,25.555
NetC414_2: C414.2 T402.1 | length 1.8
  Top Layer w0.254: T402.1 56.86,8.01 C414.2
NetC415_1: C415.1 R432.1 | length 1.6
  Top Layer w0.254: C415.1 82.53,27.73 R432.1@82.62,27.64
NetC416_1: C416.1 R433.1 | length 1.6
  Top Layer w0.254: C416.1 82.45,8.44 R433.1
NetC417_2: C417.2 R430.1 R434.2 R435.2 | length 5.9
  Top Layer w0.254: R434.2 82.69,31.54 R430.1 82.74,32.992 R435.2 R435.2@83.365,32.871 ; C417.2 C417.2@81.4,31.558
NetC418_2: C418.2 R431.1 R436.2 R437.2 | length 5.3
  Top Layer w0.254: R436.2@79.42,12.08 81.1,12.08 82.39,12.08 R431.1 82.64,13.699 R437.2 ; R437.2@82.904,13.962 R437.2 ; R437.2@83.069,14.127 R437.2
NetC501_1: C501.1 R502.1 U501.3 | length 4.5
  Top Layer w0.254: R502.1 95.799,29.841 U501.3 97.71,32.12 C501.1
NetC502_1: C502.1 R501.1 R502.2 | length 3.8
  Top Layer w0.254: R501.1 93.83,29.89 R502.2@93.87,29.85 ; R502.2 93.86,29.655 94.53,28.985 C502.1
NetC503_1: C503.1 R504.1 U502.3 | length 4.5
  Top Layer w0.254: R504.1 95.795,10.565 U502.3 97.76,12.88 C503.1
NetC504_1: C504.1 R503.1 R504.2 | length 3.7
  Top Layer w0.254: R503.1 93.87,10.54 R504.2 93.89,10.335 94.58,9.645 C504.1
NetC601_1: C601.1 R601.2 | length 1.6
  Top Layer w0.254: R601.2 109.1,29.92 C601.1@109.16,29.98
NetC602_1: C602.1 R602.1 R605.2 R606.1 | length 5.8
  Top Layer w0.254: R602.1 C602.1 117.75,27.88 R605.2
NetC603_1: C603.1 R607.2 | length 1.5
  Top Layer w0.254: R607.2 109.08,10.5 C603.1
NetC604_1: C604.1 R608.1 R611.2 R612.1 | length 5.8
  Top Layer w0.254: R608.1@111.92,8.42 113.63,8.42 115.58,8.42 117.66,8.42 R612.1 ; R611.2@115.58,8.41 R611.2
NetD101_2: D101.2 R101.1 | length 1.8
  Top Layer w0.254: R101.1 120.05,4.011 D101.2
NetD102_2: D102.2 R102.1 | length 1.9
  Top Layer w0.254: R102.1 D102.2
NetQ301_2: Q301.2 Q302.3 | length 2.7
  Top Layer w0.254: Q302.3 23.165,22.245 Q301.2
NetQ302_2: Q302.2 R306.2 | length 2.2
  Top Layer w0.254: Q302.2 21.16,18.49 R306.2
NetQ401_2: Q401.2 Q402.2 Q409.3 | length 6.8
  Top Layer w0.254: Q401.2@41.18,25.71 41.18,24.96 41.835,24.305 42.959,24.305 ; Q409.3 42.27,23.335 42.959,24.024 42.959,24.305 ; Q402.2@44.46,25.551 44.46,25.33 44.46,24.955 43.81,24.305 42.959,24.305
NetQ403_2: Q403.2 Q404.2 Q410.3 | length 7
  Top Layer w0.254: Q404.2@39.88,31.605 39.88,32.355 40.515,32.99 41.533,32.99 ; Q410.3 42.17,33.93 41.533,33.293 41.533,32.99 ; Q403.2@42.988,31.545 43.16,31.717 Q403.2 43.16,32.325 42.495,32.99 41.533,32.99
NetQ405_2: Q405.2 Q406.2 Q411.3 | length 6.2
  Top Layer w0.254: Q405.2 41.25,5.845 41.885,5.21 42.861,5.21 42.862,5.209 42.94,5.209 ; Q411.3 42.3,4.245 42.94,4.885 42.94,5.209 ; Q406.2 44.57,5.84 44.398,5.668 43.94,5.21 43.679,5.21 43.678,5.209 42.94,5.209
NetQ407_2: Q407.2 Q408.2 Q412.3 | length 6.2
  Top Layer w0.254: Q408.2 39.95,13.235 40.588,13.873 41.646,13.873 ; Q412.3 42.24,14.825 41.646,14.231 41.646,13.873 ; Q407.2 43.27,13.235 42.632,13.873 41.646,13.873
NetQ409_2: Q409.2 R413.2 | length 4.4
  Top Layer w0.254: Q409.2 42.92,20.712 43.092,20.54 43.972,20.54 45.09,21.658 45.09,22.476 44.75,22.816 R413.2@44.75,23.041 ; R413.2@44.318,23.512 R413.2@44.38,23.45
NetQ410_2: Q410.2 R414.1 | length 4.8
  Top Layer w0.254: Q410.2 41.52,36.08 42.289,35.311 42.578,35.311 43.802,34.087 44.386,34.087 R414.1@44.451,34.022 ; R414.1@44.198,33.769 R414.1@44.451,34.022 ; R414.1 R414.1@44.451,34.022
NetQ411_2: Q411.2 R415.2 | length 4.4
  Top Layer w0.254: Q411.2 42.95,1.622 43.122,1.45 44.18,1.45 45.01,2.28 45.01,3.77 R415.2
NetQ412_2: Q412.2 R416.1 | length 4.3
  Top Layer w0.254: Q412.2 41.59,16.975 42.359,16.206 42.648,16.206 43.872,14.982 44.582,14.982 R416.1
NetQ413_2: Q413.2 R422.2 | length 2.3
  Top Layer w0.254: Q413.2 72.61,29.315 R422.2
NetQ414_2: Q414.2 R423.2 | length 2.5
  Top Layer w0.254: Q414.2 66.185,31.205 R423.2 R423.2@66.42,31.665
NetQ414_3: Q414.3 R413.1 R414.2 | length 38.4
  Top Layer w0.254: R414.2 46.551,34.16 47.75,34.16 57.358,34.16 62.889,28.629 ; R413.1 46.659,23.099 47.85,23.099 57.359,23.099 62.91,28.65 Q414.3
NetQ415_2: Q415.2 R424.2 | length 2.4
  Top Layer w0.254: Q415.2 72.875,10.105 R424.2@73.145,10.375
NetQ416_2: Q416.2 R425.2 | length 2.1
  Top Layer w0.254: Q416.2 66.33,11.9 R425.2
NetQ416_3: Q416.3 R415.1 R416.2 | length 38.4
  Top Layer w0.254: R416.2 46.6,15.08 47.83,15.08 57.25,15.08 62.875,9.455 ; R415.1 46.702,4.002 47.913,4.002 57.422,4.002 62.875,9.455 ; Q416.3 62.875,9.455
NetQ417_1: Q417.1 R438.2 | length 2
  Top Layer w0.254: Q417.1 72.08,33.58 R438.2
NetQ417_3: Q417.3 R423.1 | length 2.6
  Top Layer w0.254: R423.1@68.37,31.36 Q417.3
NetQ418_1: Q418.1 R439.2 | length 1.9
  Top Layer w0.254: Q418.1 72.09,14.31 R439.2
NetQ418_3: Q418.3 R425.1 | length 2.6
  Top Layer w0.254: R425.1 68.485,12.155 Q418.3
NetR426_1: R426.1 R432.2 U401.4 | length 7.1
  Top Layer w0.254: R426.1@84.51,25.24 R432.2@84.51,27.624 ; R426.1@84.589,25.561 R426.1 84.58,27.624 R432.2 84.743,27.505 U401.4 U401.4@86.5,26.846
NetR427_1: R427.1 R433.2 U402.4 | length 4.9
  Top Layer w0.254: R427.1 84.48,6.09 R433.2 84.635,8.155 U402.4 86.53,7.646 U402.4@86.518,7.646
NetR428_2: R428.2 R430.2 U401.3 | length 4.7
  Top Layer w0.254: R430.2@84.267,32.088 84.64,31.715 R430.2 84.64,29.882 84.794,29.728 R428.2@84.643,29.616 ; R428.2 84.922,29.855 U401.3
NetR429_2: R429.2 R431.2 U402.3 | length 4.1
  Top Layer w0.254: R429.2@84.44,10.205 R429.2 ; R431.2@84.44,11.928 R429.2 ; R431.2@84.56,11.908 R431.2@84.743,12.09 ; U402.3 84.515,10.505 R429.2
NetR601_1: R601.1 R604.2 U601.1 | length 4
  Top Layer w0.254: U601.1 105.66,29.86 R601.1 R604.2
NetR602_2: R602.2 R604.1 U601.4 | length 12.2
  Top Layer w0.254: U601.4 101.865,27.504 101.865,25.855 v1(101.87,25.85) ; R604.1 110.07,27.86 R602.2
  Bottom Layer w0.254: v1(101.87,25.85) 101.94,25.92 101.94,26.39 103.405,27.855 v1(108.855,27.855)
NetR607_1: R607.1 R610.2 U602.1 | length 4
  Top Layer w0.254: U602.1 105.625,10.585 R607.1 R610.2
NetR608_2: R608.2 R610.1 U602.4 | length 12
  Top Layer w0.254: U602.4 101.96,8.195 101.96,6.65 v1(102,6.61) ; R610.1 107.635,8.465 v1(108.805,8.465) 109.935,8.465 R608.2 R608.2@110.02,8.38
  Bottom Layer w0.254: v1(102,6.61) 102.07,6.68 102.07,7.15 103.385,8.465 v1(108.805,8.465)
RX_I: C601.2 J101.1 R603.2 | length 28.2
  Top Layer w0.254: C601.2 112.44,29.98 R603.2 ; R603.2@112.892,29.528 112.892,29.725 113.117,29.95 v1(114.15,29.95) 115.031,29.95 115.158,29.95 ccw(c115.158,30.331) 115.539,30.331 115.539,31.412 cw(c115.92,31.412) 116.301,31.412 116.301,29.27 ccw(c116.682,29.27) 117.063,29.27 117.063,31.412 cw(c117.444,31.412) 117.825,31.412 117.825,29.27 ccw(c118.206,29.27) 118.587,29.27 118.587,30.48 cw(c118.968,30.48) 119.349,30.48 119.349,30.331 ccw(c119.73,30.331) 119.73,29.95 120.48,29.95 120.722,29.708 124.695,25.735 125.395,25.735 J101.1
RX_Q: C603.2 J101.3 R609.2 | length 28.2
  Top Layer w0.254: C603.2 112.44,10.48 R609.2 v1(114.16,10.47)
  Bottom Layer w0.254: v1(114.16,10.47) 114.16,18.52 125.344,29.704 125.344,29.73 125.73,30.116 J101.3
RX_SIG_IN: C201.1 C202.1 J102.1 J102.2 L201.1 | length 16.4
  Top Layer w0.254: J102.1 3.81,26.67 ; J102.2 3.81,26.67 ; C202.1@8.94,18.215 8.854,18.301 C201.1 5.005,18.301 4.07,19.236 4.07,26.41 3.81,26.67
VBIAS1: C419.2 R405.2 R406.2 R407.2 R408.1 R417.2 R420.1 | length 107.5
  Top Layer w0.254: R417.2 35.65,19.08 R420.1 37.37,19.14 C419.2 37.51,19.08 v1(38.86,19.08) ; R406.2 50.663,5.98 v1(51.993,5.98) ; R405.2 50.696,25.156 v1(51.973,25.156) ; R408.1 50.7,12.9 v1(51.91,12.9) ; R407.2 50.751,32.09 v1(52.06,32.09)
  Bottom Layer w0.254: v1(38.86,19.08) 45.8,19.08 ; 51.698,24.978 48.804,22.084 45.8,19.08 ; 51.699,24.978 v1@51.876,25.155 ; v1(51.973,25.156) 51.876,25.156 38.419,25.156 36.053,27.522 36.053,30.018 38.315,32.28 51.774,32.28 51.964,32.09 v1(52.06,32.09) ; v1(51.993,5.98) 38.294,5.98 35.982,8.292 35.982,10.662 38.22,12.9 v1(51.91,12.9) 51.91,12.97 45.8,19.08
VBIAS2: C420.2 R409.1 R410.1 R411.1 R412.1 R420.2 R421.1 | length 38.3
  Top Layer w0.254: v1(32.94,5.87) 34.11,5.87 R411.1 ; v1(32.98,32.39) R410.1 ; R409.1@33.698,24.543 34.07,24.915 R409.1@34.07,25.14 ; R421.1 33.71,19.16 R420.2 32.03,19.14 C420.2 ; R409.1 34.11,25.18 32.83,25.18 30.84,23.19 30.84,20.105 31.735,19.21 C420.2 ; R412.1 34.21,13.12 v1(32.94,13.12) 31.672,14.388 31.672,18.922 C420.2
  Bottom Layer w0.254: v1(32.94,5.87) v1(32.94,13.12) ; v1(32.95,25.18) 32.965,25.195 32.965,32.375 v1(32.98,32.39)

## Polygon pours and split planes (outlines as drawn)
GND on Inner Layer 1 "NONET_L-01_P-001" (solid, pour order 1): 0,38.1 0,0 128.27,0 128.27,38.1
+5 on Inner Layer 2 "NONET_L-01_P-001" (solid, pour order 2): 0,38.1 0,0 128.27,0 128.27,38.097 128.272,38.099

## Silkscreen, mask and mechanical layers (free items; w line width, h text height)
Top Overlay:
  drawing of 63 lines, arcs and shapes, not listed
  text "Subsystem A | Team AA7" at 11.45,34.963 h1.5
  text "03/09/2026" at 11.45,33.604 h1.3
  text "LPF I" at 101.09,32.97 h1
  text "GND" at 4.31,32.801 h1
  text "GND" at 122.13,32.751 h1
  text "V2" at 11.421,32.39 h1.3
  text "MIXER I" at 89.15,32.31 h1
  text "GND" at 4.33,30.241 h1
  text "RX_Q" at 121.79,30.228 h1
  text "RX_SIG_IN" at 4.33,27.758 h1
  text "+5V" at 122.528,27.557 h1
  text "RX_SIG_IN" at 4.29,25.158 h1
  text "RX_I" at 122.2,25.058 h1
  text "BPF" at 15.81,22.59 h1
  text "LNA" at 29.38,20.91 h1
  text "LPF Q" at 101.07,13.67 h1
  text "MIXER Q" at 89.19,13.14 h1
  text "+5V" at 124.31,3.611 h1
  text "/TXEN" at 124.33,1.331 h1
  text "Joshua Wong" at 21.717,1.112 h1.5
  text "David Ceuca" at 3.17,1.097 h1.5
  text "James Wang" at 12.517,1.042 h1.5
  text "LO_0" at 96.88,0.268 h1
  text "GND" at 91.72,0.261 h1
  text "LO_90" at 94.01,0.258 h1
  text "/TXEN" at 99.21,0.251 h1
Mechanical 1:
  the board outline again, w0.254

## Text inside footprints (layer, text, board x,y; h text height)
T301: Mechanical 13 "*" at 32.167,29.532 h0.8
T302: Mechanical 13 "*" at 32.096,10.342 h0.8
T401: Mechanical 13 "*" at 55.707,27.988 h0.8 r180
T402: Mechanical 13 "*" at 55.672,8.768 h0.8 r180